# Altium PCB PCB2.PcbDoc
Units mil, origin at the board's own origin, x right, y up, seen from the top; angles counter-clockwise.
Board outline 6000 x 4000 mil, 2 copper layers (Top Layer, Bottom Layer); 42 components, 76 nets, 256 pads, 0 vias.
Unrouted connection lines stored in the file: 158.
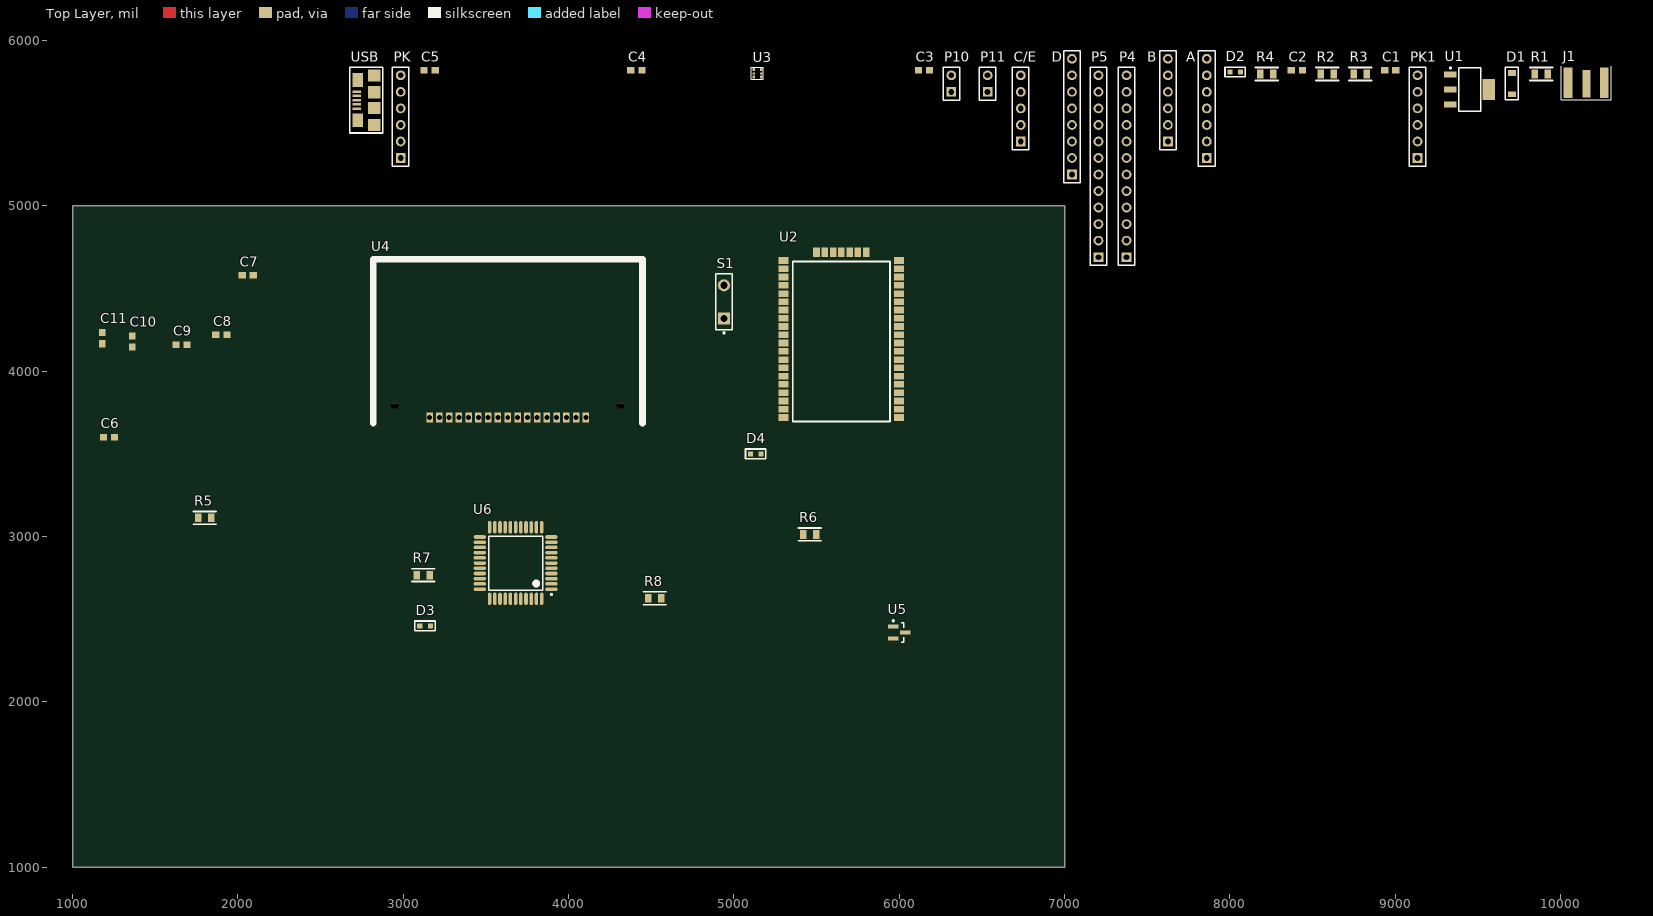
[diagram p0: Top Layer view]
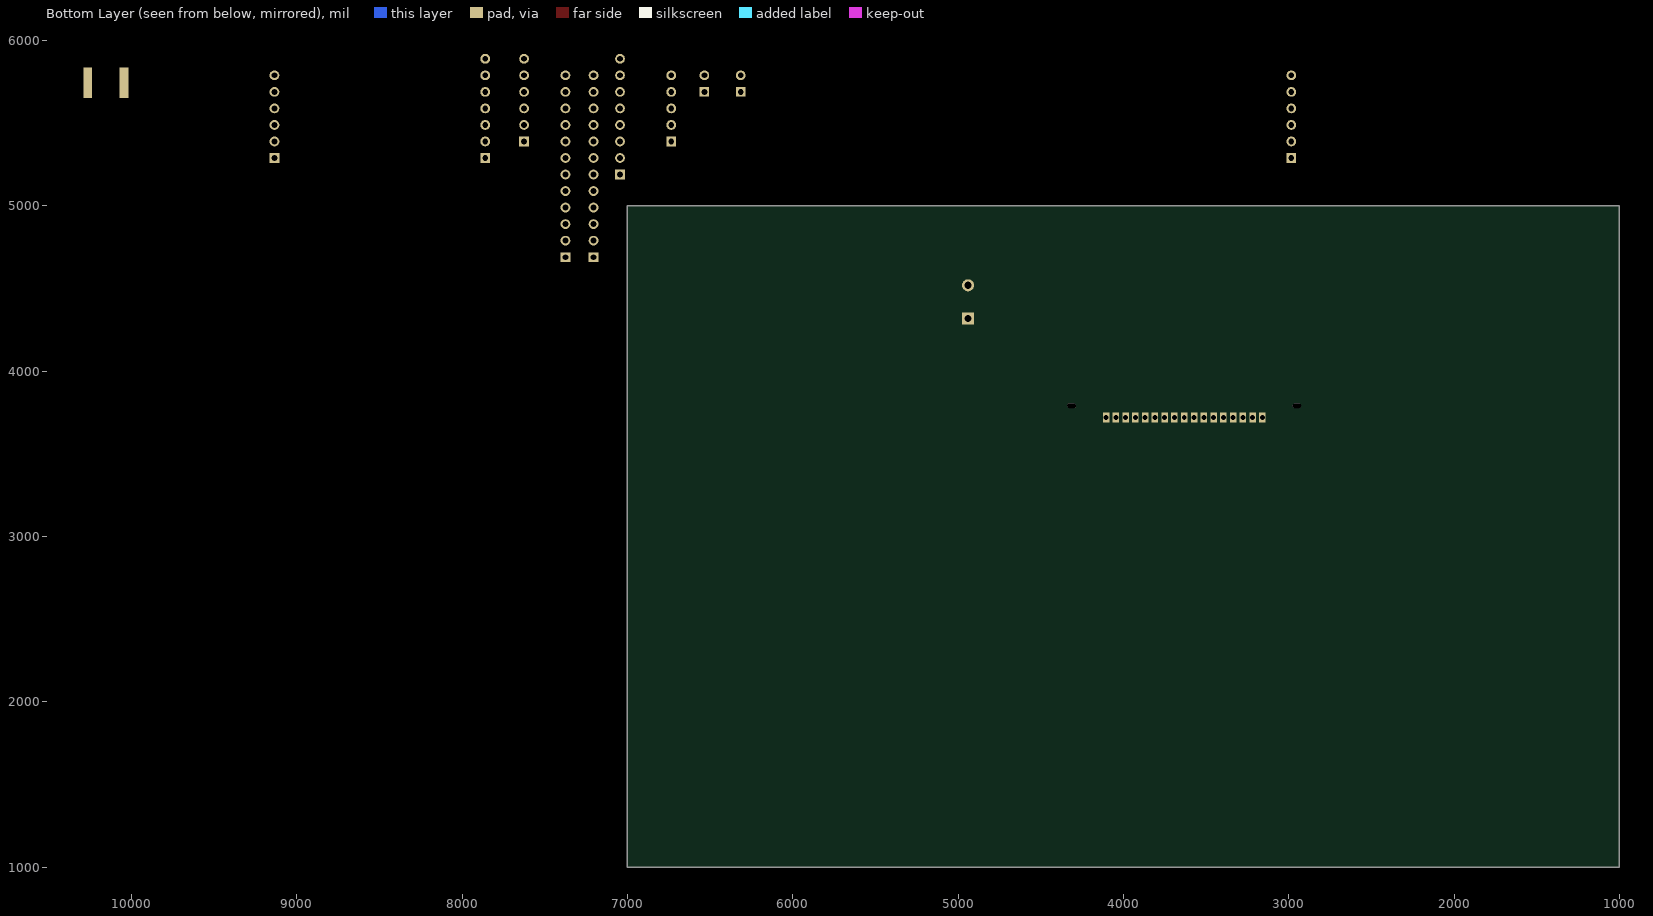
[diagram p1: Bottom Layer view, seen from below]

## Layer stack, top to bottom
Top Layer: signal copper 1.4
Dielectric: dielectric 12.6, FR-4, Dk 4.8
Bottom Layer: signal copper 1.4

## Board outline
1000,1000 7000,1000 7000,5000 1000,5000

## Design rules (kind name [scope] priority, off if disabled: settings)
Clearance [All] p1: gap=7
PolygonConnect [All] p1: connectstyle=Relief reliefconductorwidth=10 reliefentries=4 polygonreliefangle="90 Angle"
RoutingVias [All] p1: holewidth=28 width=50 viastyle="Through Hole" minholewidth=28 minwidth=50 maxholewidth=28 maxwidth=50
SilkscreenOverComponentPads [All] p1: minsilkscreentomaskgap=10
SolderMaskExpansion [All] p1: expansion=4
TestPointUsage [All] p1: valid=0 allowmultiple=FALSE
Testpoint [All] p1: side=15 testpointundercomponent=TRUE minsize=40 maxsize=100 preferedsize=60 minholesize=0 maxholesize=40 preferedholesize=32 testpointgrid=1 style=1023 order=0-112345678
Width [All] p1: maxlimit=10 minlimit=10 preferedwidth=10
23 further rules are at their usual default settings.

## Components (designator, comment, footprint, x,y, rotation, side; value= is the part's Value field where it differs from the comment)
A "PINA" HDR1X7 7860,5290 r90 top (schematic designator P2)
B "PINB" HDR1X6 7625,5390 r90 top (schematic designator P3)
C1 "10V" 1608[0603] 8970,5820 r0 top
C2 "10V" 1608[0603] 8405,5820 r0 top
C3 "10V" 1608[0603] 6150,5820 r0 top
C4 "10V" 1608[0603] 4410,5820 r0 top
C5 "10V" 1608[0603] 3160,5820 r0 top
C6 "10V" 1608[0603] 1220,3600 r180 top
C7 "10V" 1608[0603] 2060,4580 r0 top
C8 "10V" 1608[0603] 1900,4220 r0 top
C9 "10V" 1608[0603] 1660,4160 r0 top
C10 "10V" 1608[0603] 1360,4180 r90 top
C11 "10V" 1608[0603] 1180,4200 r90 top
C/E "PINC/E" HDR1X5 6735,5390 r90 top (schematic designator P7)
D "PIND" HDR1X8 7045,5190 r90 top (schematic designator P6)
D1 "MBR0520LT1G" Diode 9705,5740 r90 top
D2 "RED" LED 8000,5810 r0 top
D3 "RED" LED 3100,2460 r0 top
D4 "Green" LED 5100,3500 r0 top
J1 "Antenna" Antenna 10045,5745 r0 top
P4 "Header 12" HDR1X12 7375,4690 r90 top
P5 "Header 12" HDR1X12 7205,4690 r90 top
P10 "VCC" HDR1X2 6315,5690 r90 top
P11 "GND" HDR1X2 6535,5690 r90 top
PK "DNP pickit" HDR1X6 2985,5290 r90 top (schematic designator P9)
PK1 "DNP Pickit3" HDR1X6 9135,5290 r90 top (schematic designator P1)
R1 "Res3" Resistor 9825,5825 r0 top
R2 "Res3" Resistor 8530,5825 r0 top
R3 "Res3" Resistor 8730,5825 r0 top
R4 "Res3" Resistor 8165,5825 r0 top
R5 "Res3" Resistor 1740,3140 r0 top
R6 "Res3" Resistor 5400,3040 r0 top
R7 "Res3" Resistor 3180,2740 r180 top
R8 "Res3" Resistor 4580,2600 r180 top
S1 "SW-PB" SPST-2 4940,4420 r90 top
U1 "MCP1825S-3302E/DB" SOT-223-DB3_L 9450,5705 r0 top
U2 "RN2903" RN2903 5300,4720 r0 top
U3 "PNJ4K01FTR-ND" PNJ4K01FTR-ND 5120,5780 r0 top
U4 "OLED" OLED 3160,3720 r0 top
U5 "MCP9700" SOT95P237X10-3N 6000,2420 r0 top
U6 "Pic18lf45k50" TQFP80P1200X1200X120-44N 3680,2840 r180 top
USB "USB MICRO" "CONN USB MICRO B" 2825,5490 r90 top (schematic designator P8)

## Footprints (in the part's own frame and the unit in brackets; to place one, negate y for a bottom-side part, rotate by r counter-clockwise, add the part's x,y. Pads: shape width x height; smd on the part's side, far side on the other; paste and mask are expansions set on the pad)
1608[0603] [mm] "Chip Capacitor; Body 1.6 x 0.8 mm (LxW typ)"
  rect 1.1x1 smd: 1(-0.85,0) 2(0.85,0)
Antenna [mm] "SMA-J-P-X-ST-EM1"
  rect 1.27x4.2 smd: 1(2.825,-0.15)
  rect 1.35x4.7 smd: 2(0,0) 3(5.56,0)
  rect 1.35x4.7 smd far side: 4(0,0) 5(5.56,0)
  silkscreen extent -1,-2.63 6.63,2.5
"CONN USB MICRO B" [mm] "10118192-0001LF"
  rect 2.1x1.6 smd: 0(0.7,2.55) 0(6.9,2.55)
  round 0.25 on Top Overlay: 0(2.05,3.325)
  rect 0.4x1.35 smd: 1(2.5,2.675) 2(3.15,2.675) 3(3.8,2.675) 4(4.45,2.675) 5(5.1,2.675)
  rect 1.8x1.9 smd: 6(0,0) 9(7.6,0)
  rect 1.9x1.9 smd: 7(2.6,0) 8(5,0)
  silkscreen extent -1.25,-1.3 8.85,3.75
Diode [mm]
  rect 0.91x1.22 smd: 1(-1.635,0) 2(1.635,0)
  silkscreen extent -2.48,-1 2.48,1
HDR1X2 [mm] "Connector; Header; 2 Position"
  rect 1.5x1.5 hole 0.9: 1(0,0)
  round 1.5 hole 0.9: 2(2.54,0)
  silkscreen extent -1.27,-1.27 3.81,1.27
HDR1X5 [mm] "Connector; Header; 5 Position"
  rect 1.5x1.5 hole 0.9: 1(0,0)
  round 1.5 hole 0.9: 2(2.54,0) 3(5.08,0) 4(7.62,0) 5(10.16,0)
  silkscreen extent -1.27,-1.27 11.43,1.27
HDR1X6 [mm] "Connector; Header; 6 Position"
  rect 1.5x1.5 hole 0.9: 1(0,0)
  round 1.5 hole 0.9: 2(2.54,0) 3(5.08,0) 4(7.62,0) 5(10.16,0) 6(12.7,0)
  silkscreen extent -1.27,-1.27 13.97,1.27
HDR1X7 [mm] "Connector; Header; 7 Position"
  rect 1.5x1.5 hole 0.9: 1(0,0)
  round 1.5 hole 0.9: 2(2.54,0) 3(5.08,0) 4(7.62,0) 5(10.16,0) 6(12.7,0) 7(15.24,0)
  silkscreen extent -1.27,-1.27 16.51,1.27
HDR1X8 [mm] "Connector; Header; 8 Position"
  rect 1.5x1.5 hole 0.9: 1(0,0)
  round 1.5 hole 0.9: 2(2.54,0) 3(5.08,0) 4(7.62,0) 5(10.16,0) 6(12.7,0) 7(15.24,0) 8(17.78,0)
  silkscreen extent -1.27,-1.27 19.05,1.27
HDR1X12 [mm] "Connector; Header; 12 Position"
  rect 1.5x1.5 hole 0.9: 1(0,0)
  round 1.5 hole 0.9: 2(2.54,0) 3(5.08,0) 4(7.62,0) 5(10.16,0) 6(12.7,0) 7(15.24,0) 8(17.78,0) 9(20.32,0) 10(22.86,0) 11(25.4,0) 12(27.94,0)
  silkscreen extent -1.27,-1.27 29.21,1.27
LED [mm] "APT1608EC"
  rect 0.8x0.8 smd: 1(0,0) 2(1.65,0)
  silkscreen extent -0.75,-0.75 2.37,0.75
OLED [mm] "NHD-C12832A1Z-FSW-FBW-3V3"
  rect 1x1.524 hole 0.762: 1(0,0) 2(1.5,0) 3(3,0) 4(4.5,0) 5(6,0) 6(7.5,0) 7(9,0) 8(10.5,0) 9(12,0) 10(13.5,0) 11(15,0) 12(16.5,0) 13(18,0) 14(19.5,0) 15(21,0) 16(22.5,0) 17(24,0)
  oval 1.3x0.7 hole 0.7 slot 1.3 at 0 deg: 18(-5.3,1.8) 19(29.3,1.8)
  silkscreen extent -8.7,-0.9 32.7,24.3, body extent -8.77,-1.2 32.87,24.38, height 4.1
PNJ4K01FTR-ND [mm] "PNJ4K01F"
  rect 0.37x0.43 smd: 1(0,0) 3(0,1.125) 4(1.13,1.125) 6(1.13,0)
  rect 0.37x0.3 smd: 2(0,0.56) 5(1.13,0.56)
  rect 0.1x0.1 on Top Overlay: 2(0.425,0.825) 2(0.7,0.825)
  silkscreen extent -0.38,-0.38 1.5,1.5, body extent -0.08,-0.23 1.2,1.35, height 0.53
Resistor [mm] "RNCF0805DTE10K0"
  rect 1x1.35 smd: 1(0.5,-0.675) 2(2.5,-0.675)
  silkscreen extent -0.25,-1.68 3.25,0.3
RN2903 [mil]
  rect 60x40 smd mask+3.94: 1(700,-999.61) 2(700,-949.61) 3(700,-899.61) 4(700,-849.61) 5(700,-799.61) 6(700,-749.61) 7(700,-699.61) 8(700,-649.21) 9(700,-599.21) 10(700,-549.21) 11(700,-499.21) 12(700,-449.21) 13(700,-399.21) 14(700,-349.21) 15(700,-300) 16(700,-250) 17(700,-200) 18(700,-150) 19(700,-100) 20(700,-50) 28(0,-50) 29(0,-100) 30(0,-150) 31(0,-200) 32(0,-250) 33(0,-300) 34(0,-349.21) 35(0,-399.21) 36(0,-449.21) 37(0,-499.21) 38(0,-549.21) 39(0,-599.21) 40(0,-649.21) 41(0,-699.61) 42(0,-749.61) 43(0,-799.61) 44(0,-849.61) 45(0,-899.61) 46(0,-949.61) 47(0,-999.61)
  rect 40x60 smd mask+3.94: 21(500,0) 22(450,0) 23(400,0) 24(350,0) 25(300,0) 26(250,0) 27(200,0)
  silkscreen extent 56,-1024 644,-56, body extent 0,-1050 700,0, height 131
SOT95P237X10-3N [mm] "SOT23, 3-Leads, Body 3.0x2.6mm (max), Pitch 0.95mm, IPC Medium Density"
  rect 1.6x0.6 smd: 1(-0.9,0.95) 2(-0.9,-0.95) 3(0.9,0)
  silkscreen extent -1.02,-1.5 0.7,1.92, body extent -0.7,-1.52 0.7,1.53, height 1.12
SOT-223-DB3_L [mm] "SOT223, 4-Leads, Body 6.5x3.5mm, Pitch 2.3mm, Lead Span 7mm, IPC High Density"
  rect 1.9x0.9 smd: 1(-2.95,2.3) 2(-2.95,0) 3(-2.95,-2.3)
  rect 1.9x3.2 smd: 4(2.95,0)
  silkscreen extent -3.07,-3.35 1.7,3.42, body extent -1.85,-3.35 1.85,3.35, height 1.8
SPST-2 [mm] "Circuit Breaker; 2 Leads"
  rect 1.85x1.85 hole 1.1: 1(-2.54,0)
  round 1.85 hole 1.1: 2(2.54,0)
  silkscreen extent -4.89,-1.27 4.28,1.27
TQFP80P1200X1200X120-44N [mm] "TQFP, 44-Leads, Body 12.0x12.0mm (max), Pitch 0.80mm, IPC Medium Density"
  oval 1.9x0.55 smd: 1(-5.5,4) 2(-5.5,3.2) 3(-5.5,2.4) 4(-5.5,1.6) 5(-5.5,0.8) 6(-5.5,0) 7(-5.5,-0.8) 8(-5.5,-1.6) 9(-5.5,-2.4) 10(-5.5,-3.2) 11(-5.5,-4) 23(5.5,-4) 24(5.5,-3.2) 25(5.5,-2.4) 26(5.5,-1.6) 27(5.5,-0.8) 28(5.5,0) 29(5.5,0.8) 30(5.5,1.6) 31(5.5,2.4) 32(5.5,3.2) 33(5.5,4)
  oval 0.55x1.9 smd: 12(-4,-5.5) 13(-3.2,-5.5) 14(-2.4,-5.5) 15(-1.6,-5.5) 16(-0.8,-5.5) 17(0,-5.5) 18(0.8,-5.5) 19(1.6,-5.5) 20(2.4,-5.5) 21(3.2,-5.5) 22(4,-5.5) 34(4,5.5) 35(3.2,5.5) 36(2.4,5.5) 37(1.6,5.5) 38(0.8,5.5) 39(0,5.5) 40(-0.8,5.5) 41(-1.6,5.5) 42(-2.4,5.5) 43(-3.2,5.5) 44(-4,5.5)
  silkscreen extent -5.63,-4.15 4.15,4.95, body extent -5,-5 5,5, height 1.2

## Part data
A: library part "Header 7", "Header, 7-Pin"
B PK PK1: library part "Header 6", "Header, 6-Pin"
C1 C2 C3 C4 C5 C6 C7 C8 C9 C10 C11: library part "Cap Semi", "Capacitor (Semiconductor SIM Model)"
C/E: library part "Header 5", "Header, 5-Pin"
D: library part "Header 8", "Header, 8-Pin"
D1: library part MBR0520LT1GOSTR-ND
D2 D3 D4: library part LED2, "Typical RED, GREEN, YELLOW, AMBER GaAs LED"
P4 P5: "Header, 12-Pin"
P10 P11: library part "Header 2", "Header, 2-Pin"
R1 R2 R3 R4 R5 R6 R7 R8: "Resistor"
S1: "Switch"
U1: "500 mA, Low Voltage, Low Quiescent Current LDO Regulator, 3-Pin SOT-223, Extended Temperature"
USB: library part "CONN USB MICRO B"

## Nets (pads, with @x,y where several pads share a name; then routed paths per layer and width w, separated by ;. In a path a pad name is that pad's centre, name@x,y a point inside that pad or via, vN(x,y) a via of type N, cw(c..) or ccw(c..) an arc to the next point about the centre after c; other vN are vias at no path point)
3.3V: PK.2 R5.2
+3.3V: C3.2 P5.11 U3.1 U5.1 U6.7 U6.28 U6.37
+VUSB: D1.2 R2.2 R3.2 USB.1
GND: C1.1 C2.1 C3.1 C4.1 C5.1 C6.1 C7.1 C8.1 C11.1 D2.2 D3.2 D4.2 J1.2 J1.3 P4.12 P5.12 P11.1 P11.2 PK1.3 PK.3 R4.1 S1.1 U1.2 U1.4 U2.1 U2.8 U2.11 U2.20 U2.21 U2.22 U2.24 U2.26 U2.27 U2.28 U2.33 U2.41 U2.47 U3.2@5120,5802.05 U3.3 U3.4 U3.5 U4.11 U4.19 U5.3 U6.6 U6.29 USB.5 USB.6 USB.7 USB.8 USB.9
NetA_1: A.1 R7.1 U6.30
NetA_2: A.2 R8.1 U6.31
NetA_3: A.3 U6.24
NetA_4: A.4 U6.23
NetA_5: A.5 U3.6 U6.22
NetA_6: A.6 U5.2 U6.21
NetA_7: A.7 U4.15 U6.20
NetB_1: B.1 U4.13 U6.8
NetB_2: B.2 U4.14 U6.9
NetB_3: B.3 U4.16 U6.10
NetB_4: B.4 U6.11
NetB_5: B.5 U4.17 U6.14
NetB_6: B.6 U6.15
NetC1_2: C1.2 D1.1 U1.1
NetC4_2: C4.2 U4.1
NetC5_2: C5.2 U4.2
NetC6_2: C6.2 U4.3
NetC7_2: C7.2 U4.4
NetC8_2: C8.2 U4.5
NetC9_1: C9.1 U4.6
NetC9_2: C9.2 U4.7
NetC10_1: C10.1 U4.9
NetC10_2: C10.2 U4.8
NetC11_2: C11.2 U4.10
NetC/E_1: C/E.1 U6.35
NetC/E_2: C/E.2 U6.36
NetC/E_3: C/E.3 U6.25
NetC/E_4: C/E.4 U6.26
NetC/E_5: C/E.5 U6.27
NetD2_1: D2.1 R2.1
NetD3_1: D3.1 R7.2
NetD4_1: D4.1 R8.2
NetD_1: D.1 U6.38
NetD_2: D.2 U6.39
NetD_3: D.3 U6.40
NetD_4: D.4 U6.41
NetD_5: D.5 U6.2
NetD_6: D.6 U6.3
NetD_7: D.7 U6.4
NetD_8: D.8 U6.5
NetJ1_1: J1.1 U2.23
NetP4_1: P4.1 PK1.1 R1.1 U2.32
NetP4_2: P4.2 U2.35
NetP4_3: P4.3 U2.36
NetP4_4: P4.4 U2.37
NetP4_5: P4.5 U2.38
NetP4_6: P4.6 U2.39
NetP4_7: P4.7 U2.40
NetP4_8: P4.8 U2.43
NetP4_9: P4.9 U2.44
NetP4_10: P4.10 U2.45
NetP4_11: P4.11 U2.46
NetP5_1: P5.1 U2.14
NetP5_2: P5.2 U2.13
NetP5_3: P5.3 U2.10
NetP5_4: P5.4 U2.9
NetP5_5: P5.5 U2.7 U6.44
NetP5_6: P5.6 U2.6 U6.1
NetP5_7: P5.7 U2.5
NetP5_8: P5.8 U2.4
NetP5_9: P5.9 U2.3
NetP5_10: P5.10 U2.2
NetPK1_4: PK1.4 U2.31
NetPK1_5: PK1.5 U2.30
NetPK_1: PK.1 R5.1 U6.18
NetPK_4: PK.4 U6.17
NetPK_5: PK.5 U6.16
NetR3_1: R3.1 R4.2 U6.19
NetR6_1: R6.1 S1.2 U6.32
NetU6_42: U6.42 USB.2
NetU6_43: U6.43 USB.3
VCC: C2.2 P10.1 P10.2 PK1.2 R1.2 R6.2 U1.3 U2.12 U2.34 U4.12 U4.18
pads on no net: J1.4 J1.5 PK1.6 PK.6 U2.15 U2.16 U2.17 U2.18 U2.19 U2.25 U2.29 U2.42 U3.2@5136.73,5812.48 U3.2@5147.56,5812.48 U6.12 U6.13 U6.33 U6.34 USB.0 USB.4